# Altium PCB PCB1.PcbDoc
Units mm, origin at the board's own origin, x right, y up, seen from the top; angles counter-clockwise.
Board outline 90 x 60 mm, 2 copper layers (Top Layer, Bottom Layer); 38 components, 22 nets, 149 pads, 30 vias.
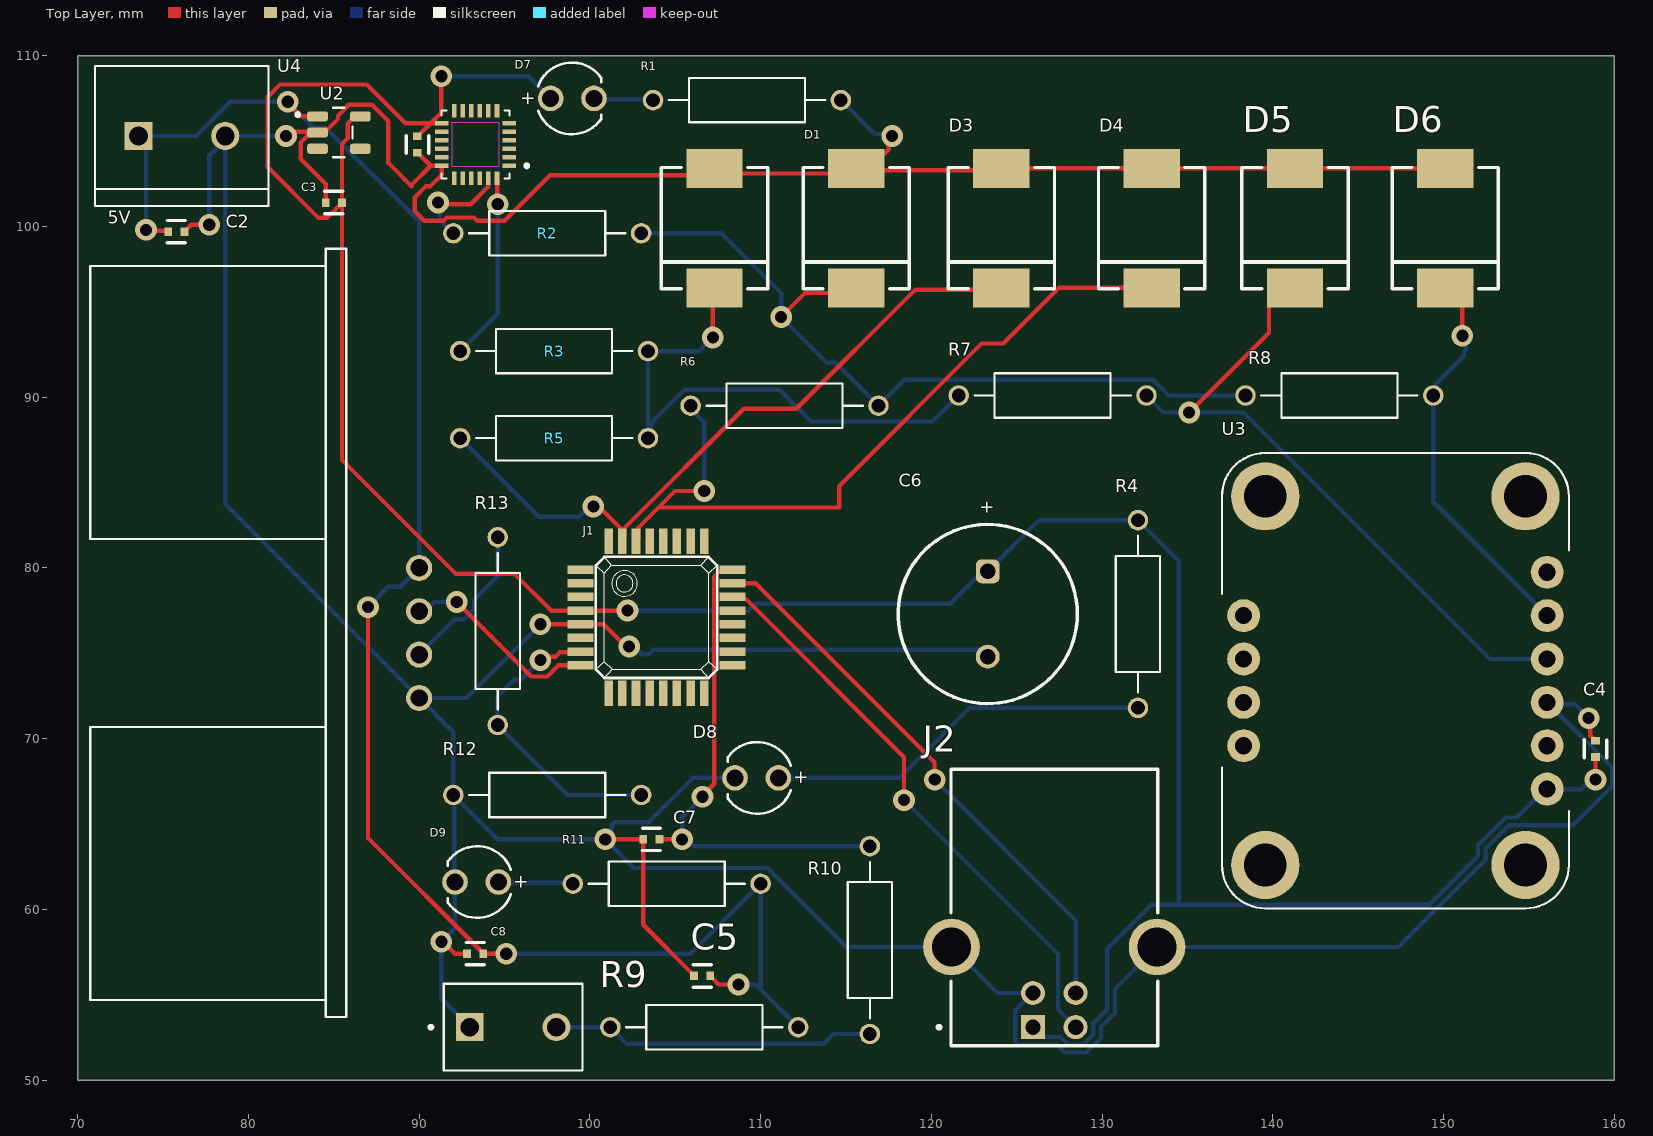
[diagram p0: Top Layer view]
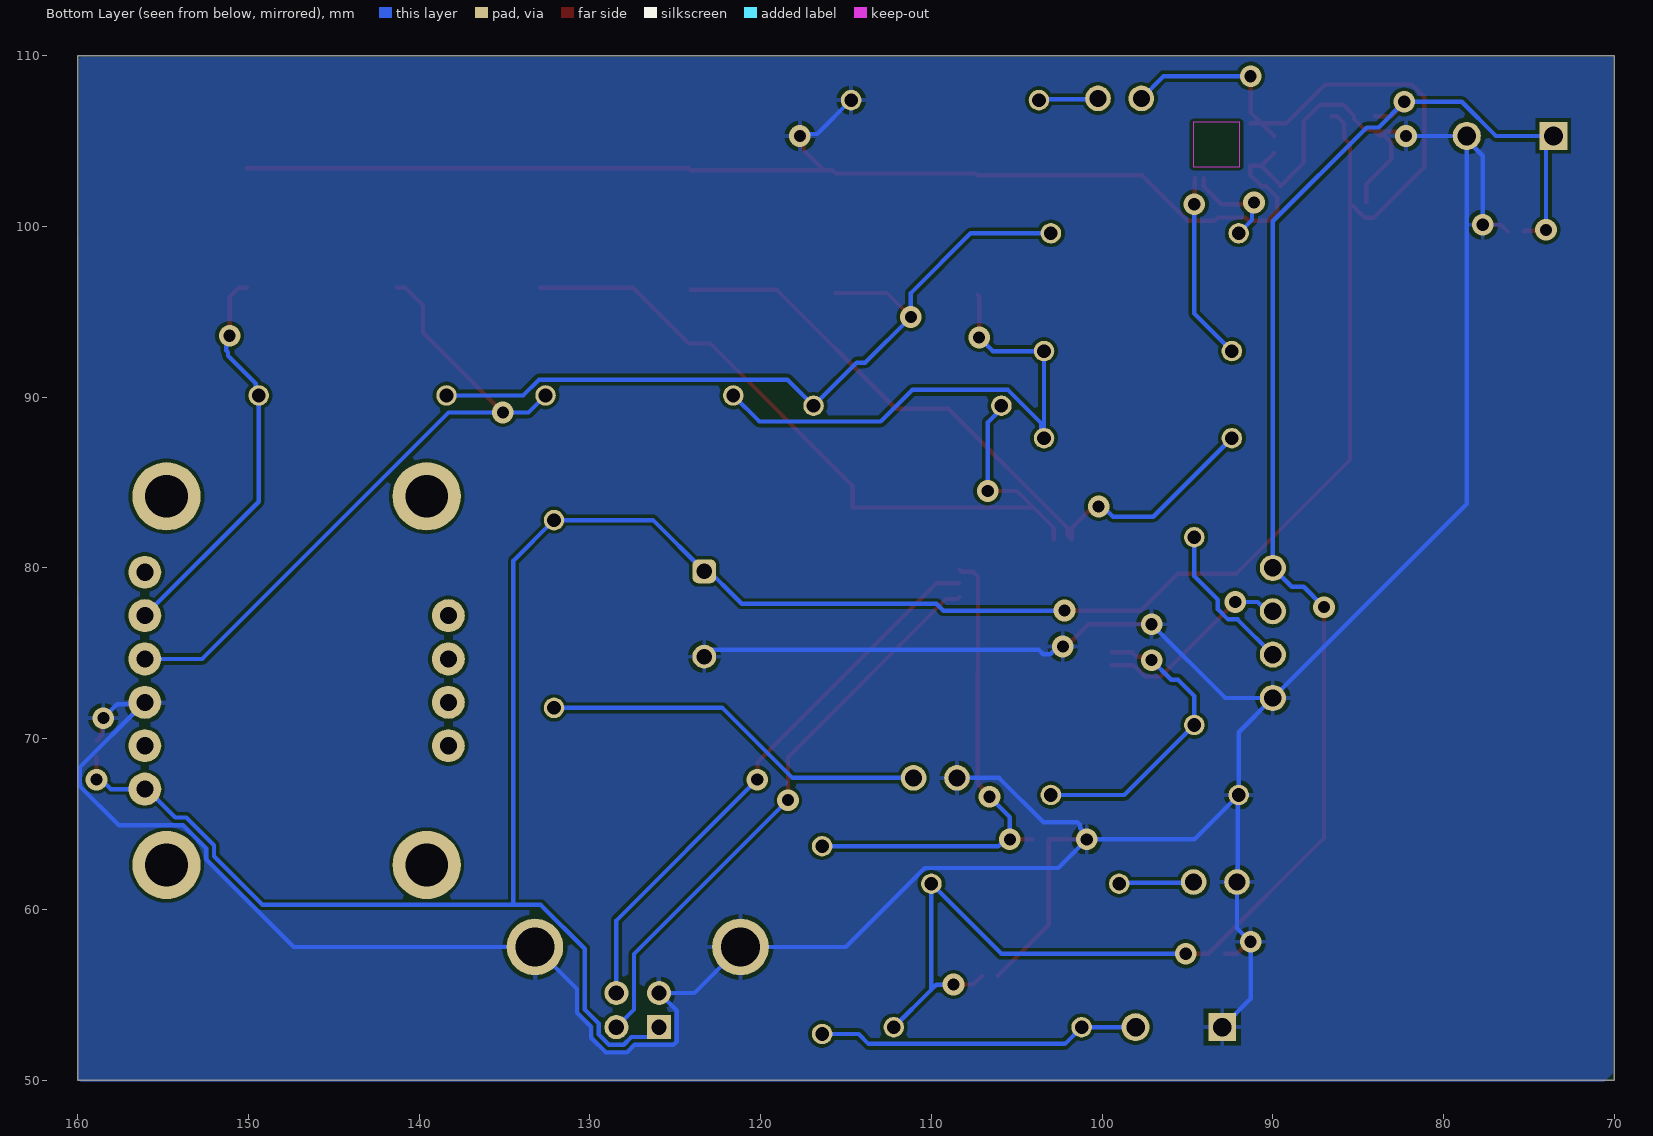
[diagram p1: Bottom Layer view, seen from below]
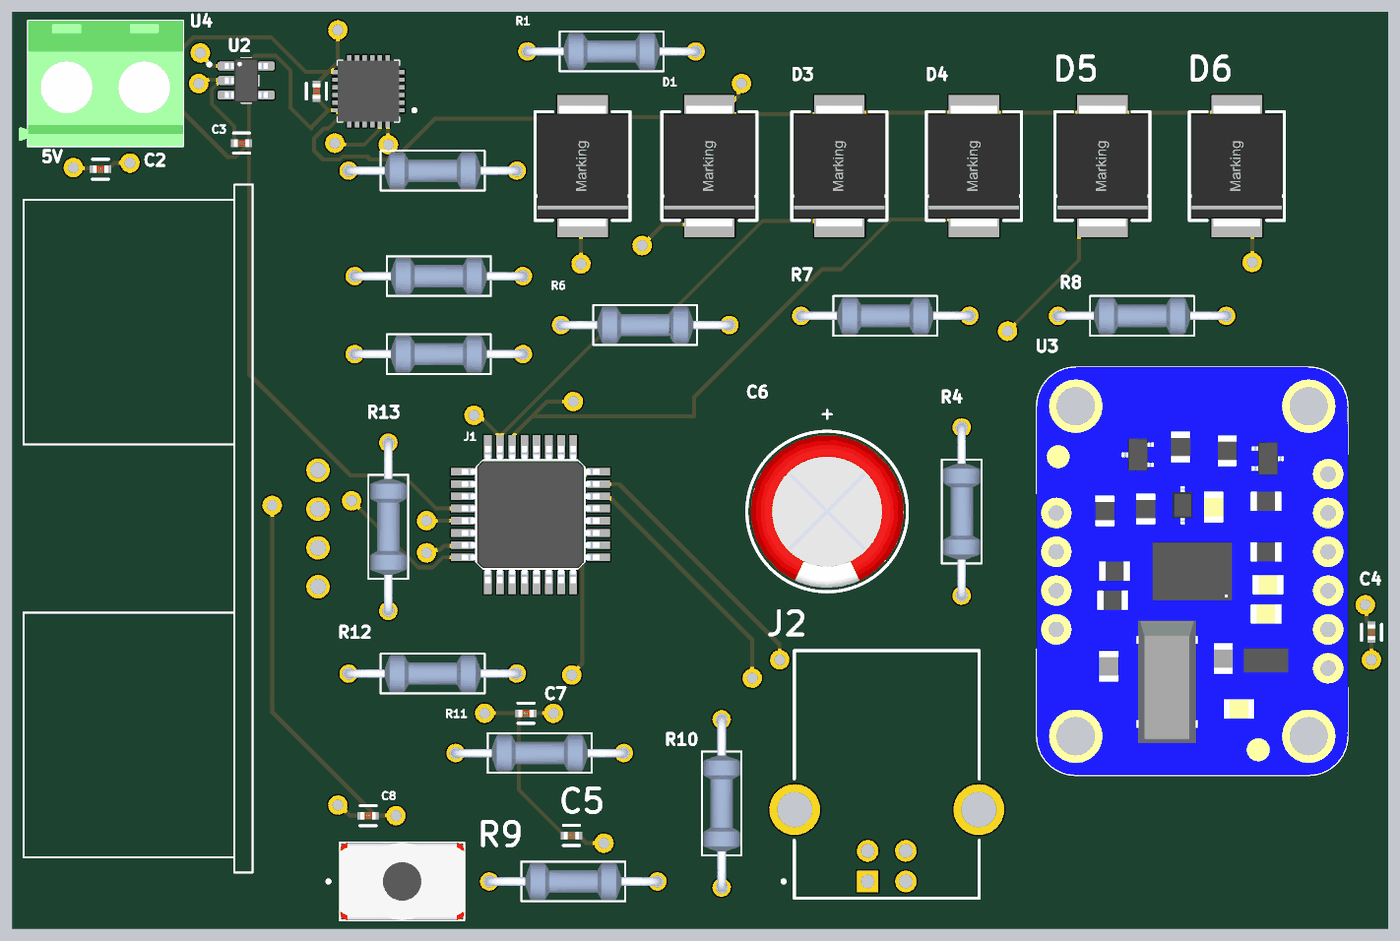
[diagram p2: 3D render of the assembled board from above, using the file's embedded part models]

## Layer stack, top to bottom
Top Solder: solder mask 0.0102, Solder Resist, Dk 3.5
Top Layer: signal copper 0.0356
Dielectric 1: dielectric 0.32, FR-4, Dk 4.8
Bottom Layer: signal copper 0.0356
Bottom Solder: solder mask 0.0102, Solder Resist, Dk 3.5

## Board outline
160,110 160,50 70,50 70,110

## Design rules (kind name [scope] priority, off if disabled: settings)
Clearance [All] p1: gap=0.2 ignorepadtopadclearanceinfootprint=TRUE
MinimumSolderMaskSliver MinimumSolderMaskSliver_3 [HasFootprint('SOT95P280X145-5N')] p1: minsoldermaskwidth=0
MinimumSolderMaskSliver MinimumSolderMaskSliver_2 [HasFootprint('QFP32_STM32') vs HasFootprint('QFP32_STM32')] p2: minsoldermaskwidth=0
MinimumSolderMaskSliver MinimumSolderMaskSliver_1 [HasFootprint('QFN50P400X400X95-24N') vs HasFootprint('QFN50P400X400X95-24N')] p3: minsoldermaskwidth=0
MinimumSolderMaskSliver [All] p4: minsoldermaskwidth=0.254
PolygonConnect [All] p1: connectstyle=Relief reliefconductorwidth=0.254 reliefentries=4 polygonreliefangle="90 Angle" airgapwidth=0.254
RoutingVias [All] p1: holewidth=0.711 width=1.27 viastyle="Through Hole" minholewidth=0.711 minwidth=1.27 maxholewidth=0.711 maxwidth=1.27
SilkToSolderMaskClearance SilkToSolderMaskClearance_5 [HasFootprint('SAMTEC_USB-B-S-X-X-TH')] p1: minsilkscreentomaskgap=0 clearancetoexposedcopper=TRUE
SilkToSolderMaskClearance SilkToSolderMaskClearance_4 [HasFootprint('QFP32_STM32')] p2: minsilkscreentomaskgap=0 clearancetoexposedcopper=TRUE
SilkToSolderMaskClearance SilkToSolderMaskClearance_3 [HasFootprint('QFN50P400X400X95-24N')] p3: minsilkscreentomaskgap=0 clearancetoexposedcopper=TRUE
SilkToSolderMaskClearance SilkToSolderMaskClearance_2 [HasFootprint('WE-TVSP_DO-214AB_Unidirectional')] p4: minsilkscreentomaskgap=0 clearancetoexposedcopper=TRUE
SilkToSolderMaskClearance SilkToSolderMaskClearance_1 [HasFootprint('WL-TMRC_D3.95H5.3')] p5: minsilkscreentomaskgap=0 clearancetoexposedcopper=TRUE
SilkToSolderMaskClearance [IsPad] p6: minsilkscreentomaskgap=0.254 clearancetoexposedcopper=TRUE
SolderMaskExpansion [All] p1: expansion=0.102 istentingtop=FALSE
SupplyNets "Schematic Supply Nets_2" [InNet('5')] p1: voltage=0.000
SupplyNets "Schematic Supply Nets_1" [InNet('+5')] p2: voltage=0.000
SupplyNets "Schematic Supply Nets" [InNet('GND')] p3: voltage=0.000
Width [All] p1: maxlimit=0.254 minlimit=0.254 preferedwidth=0.254
28 further rules are at their usual default settings.

## Classes and differential pairs
component class Sheet1: C1 C2 C3 C4 C5 C6 C7 C8 D1 D3 D4 D5 D6 D7 D8 D9 J1 J2 R1 R2 R3 R4 R5 R6 R7 R8 R9 R10 R11 R12 R13 U2 U3 U4

## Components (designator, comment, footprint, x,y, rotation, side; value= is the part's Value field where it differs from the comment)
C2 "1 Uf" FP-0402-L_1_0_0_05-W_0_5-MFG 75.775,99.7 r0 top
C3 "1 Uf" FP-0402-L_1_0_0_05-W_0_5-MFG 85,101.4 r180 top
C4 "1 Uf" FP-0402-L_1_0_0_05-W_0_5-MFG 158.9,69.4 r90 top
C5 "LMK105BJ105KVHF" FP-0402-L_1_0_0_05-W_0_5-MFG 106.575,56.1 r180 top
C6 "860040875005" WCAP-ATUL_D10H25 123.3,77.3 r90 top
C7 "LMK105BJ105KVHF" FP-0402-L_1_0_0_05-W_0_5-MFG 103.6,64.1 r180 top
C8 "1 Uf" FP-0402-L_1_0_0_05-W_0_5-MFG 93.275,57.4 r180 top
D1 "824550781" WE-TVSP_DO-214AB_Unidirectional 115.6,99.9 r90 top
D3 "824550781" WE-TVSP_DO-214AB_Unidirectional 124.1,99.9 r90 top
D4 "824550781" WE-TVSP_DO-214AB_Unidirectional 132.9,99.9 r90 top
D5 "824550781" WE-TVSP_DO-214AB_Unidirectional 141.3,99.9 r90 top
D6 "824550781" WE-TVSP_DO-214AB_Unidirectional 150.1,99.9 r90 top
D7 "151031VS06000" WL-TMRC_D3.95H5.3 1368.97,1377.5 r0 top
D8 "151031VS06000" WL-TMRC_D3.95H5.3 -1160.23,-1202.3 r180 top
D9 "151031VS06000" WL-TMRC_D3.95H5.3 -1176.63,-1208.4 r180 top
J1 "STM32G030K6T6" QFP32_STM32 103.9,77.1 r270 top
J2 "USB-B-S-X-X-TH" SAMTEC_USB-B-S-X-X-TH 127.2,57.8 r180 top
R1 "330" RESAD1100W55L680D260 109.2,107.4 r0 top
R2 "330" RESAD1100W55L680D260 97.5,99.6 r0 top
R3 "330" RESAD1100W55L680D260 97.9,92.7 r0 top
R4 "330" RESAD1100W55L680D260 132.1,77.3 r90 top
R5 "330 ohm" RESAD1100W55L680D260 97.9,87.6 r0 top
R6 "330" RESAD1100W55L680D260 111.4,89.5 r0 top
R7 "330" RESAD1100W55L680D260 127.1,90.1 r0 top
R8 "330" RESAD1100W55L680D260 143.9,90.1 r0 top
R9 "MFR-25FBF52-10K" RESAD1100W55L680D260 106.7,53.1 r0 top
R10 "1K" RESAD1100W55L680D260 116.4,58.2 r270 top
R11 "330" RESAD1100W55L680D260 104.5,61.5 r0 top
R12 "4.5k" RESAD1100W55L680D260 97.5,66.7 r0 top
R13 "1.5k" RESAD1100W55L680D260 94.6,76.3 r90 top
U2 "TLV73312PDBVR" SOT95P280X145-5N 85.3,105.5 r0 top
U3 "2472" MODULE_2472 147.18,73.395 r90 top
U4 "HC-SR04" XCVR_HC-SR04 90,76.19 r270 top
? "MPU-6050" QFN50P400X400X95-24N 93.3,104.8 r180 top
? "PMS9P1B10M2QE" SW_PMS9P1B10M2QE 95.5,53.1 r0 top
? "282837-2" TE_282837-2 76.1,105.3 r0 top
? "824550781" WE-TVSP_DO-214AB_Unidirectional 107.3,99.9 r90 top
? "1 Uf" FP-0402-L_1_0_0_05-W_0_5-MFG 89.9,104.8 r270 top

## Footprints (in the part's own frame and the unit in brackets; to place one, negate y for a bottom-side part, rotate by r counter-clockwise, add the part's x,y. Pads: shape width x height; smd on the part's side, far side on the other; paste and mask are expansions set on the pad)
FP-0402-L_1_0_0_05-W_0_5-MFG [mm]
  rect 0.45x0.5 smd paste+0 mask+0: 1(-0.475,0) 2(0.475,0)
  silkscreen extent -0.53,-0.66 0.53,0.65, body extent -0.8,-0.38 0.8,0.38, height 0.25
MODULE_2472 [mm]
  round 1.93 hole 1: 1(-6.35,-8.89) 2(-3.81,-8.89) 3(-1.27,-8.89) 4(1.27,-8.89) 5(3.81,-8.89) 6(6.35,-8.89) 7(3.81,8.89) 8(1.27,8.89) 9(-1.27,8.89) 10(-3.81,8.89)
  round 4 hole 2.5: SH1(-10.795,-7.62) SH2(10.795,-7.62) SH3(10.795,7.62) SH4(-10.795,7.62)
  silkscreen extent -13.33,-10.16 13.33,10.16, body extent -13.33,-10.16 13.33,10.16, height 4.23
QFN50P400X400X95-24N [mm]
  rect 0.79x0.28 smd: 1(-1.97,1.25) 2(-1.97,0.75) 3(-1.97,0.25) 4(-1.97,-0.25) 5(-1.97,-0.75) 6(-1.97,-1.25) 13(1.97,-1.25) 14(1.97,-0.75) 15(1.97,-0.25) 16(1.97,0.25) 17(1.97,0.75) 18(1.97,1.25)
  rect 0.28x0.79 smd: 7(-1.25,-1.97) 8(-0.75,-1.97) 9(-0.25,-1.97) 10(0.25,-1.97) 11(0.75,-1.97) 12(1.25,-1.97) 19(1.25,1.97) 20(0.75,1.97) 21(0.25,1.97) 22(-0.25,1.97) 23(-0.75,1.97) 24(-1.25,1.97)
  Keep-Out Layer region: 1.35,-1.3 -1.35,-1.3 -1.35,1.3 1.35,1.3
  silkscreen extent -3.1,-2 2,2, body extent -2,-2 2,2, height 0.93
QFP32_STM32 [mm]
  rect 0.5x1.5 smd: 1(-2.8,-4.45) 2(-2,-4.45) 3(-1.2,-4.45) 4(-0.4,-4.45) 5(0.4,-4.45) 6(1.2,-4.45) 7(2,-4.45) 8(2.8,-4.45) 17(2.8,4.45) 18(2,4.45) 19(1.2,4.45) 20(0.4,4.45) 21(-0.4,4.45) 22(-1.2,4.45) 23(-2,4.45) 24(-2.8,4.45)
  rect 1.5x0.5 smd: 9(4.45,-2.8) 10(4.45,-2) 11(4.45,-1.2) 12(4.45,-0.4) 13(4.45,0.4) 14(4.45,1.2) 15(4.45,2) 16(4.45,2.8) 25(-4.45,2.8) 26(-4.45,2) 27(-4.45,1.2) 28(-4.45,0.4) 29(-4.45,-0.4) 30(-4.45,-1.2) 31(-4.45,-2) 32(-4.45,-2.8)
  silkscreen extent -3.55,-3.55 3.55,3.55, body extent -4.5,-4.5 4.5,4.5, height 1.6
RESAD1100W55L680D260 [mm]
  round 1.2 hole 0.8: 1(-5.5,0) 2(5.5,0)
  silkscreen extent -4.58,-1.3 4.58,1.3, body extent -5.77,-1.2 5.77,1.2, height 2.4
SAMTEC_USB-B-S-X-X-TH [mm]
  rect 1.408x1.408 / inner round 1.408 / far side rect 1.408x1.408 hole 0.9: 1(1.25,4.7)
  round 1.408 hole 0.9: 2(-1.25,4.7) 3(-1.25,2.7) 4(1.25,2.7)
  round 3.316 hole 2.3: S1(-6.02,0) S2(6.02,0)
  silkscreen extent -6.05,-10.4 6.85,5.8
SOT95P280X145-5N [mm]
  rrect50% 1.21x0.59 smd: 1(-1.255,0.95) 2(-1.255,0) 3(-1.255,-0.95) 4(1.255,-0.95) 5(1.255,0.95)
  silkscreen extent -2.51,-1.45 0.8,1.45, body extent -1.4,-1.45 1.4,1.45, height 1.45
SW_PMS9P1B10M2QE [mm]
  rect 1.635x1.635 / inner round 1.635 / far side rect 1.635x1.635 hole 1.09: 1(-2.54,0)
  round 1.635 hole 1.09: 3(2.54,0)
  silkscreen extent -4.91,-2.54 4.07,2.54, body extent -4.07,-2.54 4.07,2.54, height 12.33
TE_282837-2 [mm]
  rect 1.65x1.65 / inner round 1.65 / far side rect 1.65x1.65 hole 1.1: 1(-2.54,0)
  round 1.65 hole 1.1: 2(2.54,0)
  silkscreen extent -5.08,-4.1 5.08,4.1, body extent -5.68,-4.1 5.08,4.1, height 10
WCAP-ATUL_D10H25 [mm] "Aluminum Electrolytic Capacitors, 10x25mm"
  rrect50% 1.4x1.4 hole 0.9: 1(2.5,0)
  round 1.4 hole 0.9: 2(-2.5,0)
  silkscreen extent -5.25,-5.25 5.25,5.25, body extent -4.99,-5 5,5, height 25.31
WE-TVSP_DO-214AB_Unidirectional [mm] "Power TVS Diode, 2-Leads. body 6.86x5.9mm"
  rect 2.3x3.3 smd: 1(-3.5,0) 2(3.5,0)
  silkscreen extent -3.55,-3.11 3.56,3.11, body extent -3.97,-2.95 3.97,2.95, height 2.48
WL-TMRC_D3.95H5.3 [mm] "THT Mono-color Round Color LED, 2-leads"
  round 1.5 hole 1: 1(-1271.27,-1270) 2(-1268.73,-1270)
  silkscreen extent -1272,-1272.1 -1268.31,-1267.9, body extent -1271.99,-1271.97 -1268.37,-1268.03, height 5.35
XCVR_HC-SR04 [mm]
  round 1.53 hole 1.02: 1(-3.81,0) 2(-1.27,0) 3(1.27,0) 4(3.81,0)
  silkscreen extent -22.5,-19.27 22.5,-4.27

## Part data
C2 C3 C4 C5 C7 C8 ?: library part CMP-14477-000640-2, "None", Capacitance=1uF, Case Code (Imperial)=0402, Case Code (Metric)=1005, Max Operating Temperature=85°C, Min Operating Temperature=-55°C, Ratings=AEC-Q200, Tolerance=10%, Voltage Rating=10V, Case/Package=0402, Halogen Free="Halogen Free", Lead Free="Lead Free", Length=0.039inch, Mount="Surface Mount", Packaging="Tape and Reel", RoHS Compliant=Yes, Series=M, Thickness=0.022inch, Voltage Rating (DC)=10V, Width=0.02inch
C6: library part CMP-03913-54202262-1, "860040875005 WCAP-ATUL Aluminum Electrolytic Capacitors", Capacitance=100µF, Case/Package=Radial, Leakage Current=100µA, Max Operating Temperature=105°C, Min Operating Temperature=-40°C, Ripple Current=800mA, Tolerance=20%, Voltage Rating=100V, Diameter=10mm, Height=25mm, Height - Seated (Max)=26.4922mm, Impedance=200mΩ, Lead Pitch=5.0038mm, Length=25mm, Life (Hours)=7000hours, Mount="Through Hole", NexarPartId=54202262, Packaging="Tape & Box (TB)", Pitch=5mm, Polarity=Polar, REACH SVHC=Unknown, RoHS=Compliant, Voltage Rating (DC)=100V
D1 D3 D4 D5 D6 ?: library part CMP-03913-71101749-1, "824550781 TVS diode [Würth Elektronik] 824550781 TVS diode", Clamping Voltage=126V, Leakage Current=2µA, Max Breakdown Voltage=91.25V, Max Operating Temperature=150°C, Min Operating Temperature=-65°C, Peak Pulse Current=23.8A, Peak Pulse Power=3kW, Power Line Protection=No, Reverse Standoff Voltage=78V, Composition=Zener, Height=2.5mm, Length=6.86mm, Min Breakdown Voltage=91.25V, Mount="Surface Mount", NexarPartId=71101749, Number of Pins=2, Number of Unidirectional Channels=1, Packaging="Cut Tape", Polarity=Unidirectional, REACH SVHC=Unknown, RoHS=Compliant, Width=5.91mm
D7 D8 D9: library part CMP-1488-00004-2, Case/Package=Radial, Color=Green, Forward Current=100mA, Forward Voltage=2.2V, Max Operating Temperature=85°C, Max Reverse Voltage (DC)=5V, Min Operating Temperature=-40°C, Test Current=20mA, Dominant Wavelength=568nm, Height=5.3mm, Lead Free="Lead Free", Length=3mm, Lens Size=3mm, Lens Style="Circular, Diffused, Round", Luminous Intensity=30mcd, Mount="Through Hole", NexarPartId=29717805, Packaging=Bulk, Peak Wavelength=560nm, REACH SVHC=Unknown, RoHS=Compliant, Viewing Angle=60°, Wavelength=568nm, Width=3mm
J1: "ARMÂ® CortexÂ®-M0+ STM32G0 Microcontroller IC 32-Bit Single-Core 64MHz 32KB (32K x 8) FLASH 32-LQFP (7x7)", Package="LQFP-32 STMicroelectronics", Check_prices=https://www.snapeda.com/parts/STM32G030K6T6/STMicroelectronics/view-part/?ref=eda, MF=STMicroelectronics, MP=STM32G030K6T6, SnapEDA_Link=https://www.snapeda.com/parts/STM32G030K6T6/STMicroelectronics/view-part/?ref=snap
J2: "USB-B (USB TYPE-B) USB 2.0 Receptacle Connector 4 Position Through Hole, Right Angle", Package=None, Check_prices=https://www.snapeda.com/parts/USB-B-S-F-W-TH-TR/Samtec/view-part/?ref=eda, MF=Samtec, MP=USB-B-S-F-W-TH-TR, SnapEDA_Link=https://www.snapeda.com/parts/USB-B-S-F-W-TH-TR/Samtec/view-part/?ref=snap
R1 R2 R3 R4 R5 R6 R7 R8 R10 R11: library part MFR-25FBF52-10K, "10.2 kOhms Â±1% 0.25W, 1/4W Through Hole Resistor Axial - Metal Film", Package="RADIAL-2 YAGEO", Check_prices=https://www.snapeda.com/parts/MFR-25FBF52-10K/Yageo/view-part/?ref=eda, MF=Yageo, MP=MFR-25FBF52-10K, SnapEDA_Link=https://www.snapeda.com/parts/MFR-25FBF52-10K/Yageo/view-part/?ref=snap
R9: "10.2 kOhms Â±1% 0.25W, 1/4W Through Hole Resistor Axial - Metal Film", Package="RADIAL-2 YAGEO", Check_prices=https://www.snapeda.com/parts/MFR-25FBF52-10K/Yageo/view-part/?ref=eda, MF=Yageo, MP=MFR-25FBF52-10K, SnapEDA_Link=https://www.snapeda.com/parts/MFR-25FBF52-10K/Yageo/view-part/?ref=snap
R12: library part MFR-25FBF52-10K, "4.5", Package="RADIAL-2 YAGEO", Check_prices=https://www.snapeda.com/parts/MFR-25FBF52-10K/Yageo/view-part/?ref=eda, MF=Yageo, MP=MFR-25FBF52-10K, SnapEDA_Link=https://www.snapeda.com/parts/MFR-25FBF52-10K/Yageo/view-part/?ref=snap
R13: library part MFR-25FBF52-10K, Package="RADIAL-2 YAGEO", Check_prices=https://www.snapeda.com/parts/MFR-25FBF52-10K/Yageo/view-part/?ref=eda, MF=Yageo, MP=MFR-25FBF52-10K, SnapEDA_Link=https://www.snapeda.com/parts/MFR-25FBF52-10K/Yageo/view-part/?ref=snap
U2: "300-mA, capacitor-free, low-IQ, low-dropout voltage regulator with enable", Package="SOT-23-5 Texas Instruments", Check_prices=https://www.snapeda.com/parts/TLV73312PDBVR/Texas+Instruments/view-part/?ref=eda, MF="Texas Instruments", MP=TLV73312PDBVR, SnapEDA_Link=https://www.snapeda.com/parts/TLV73312PDBVR/Texas+Instruments/view-part/?ref=snap
U3: "Adafruit 9-DOF Absolute Orientation IMU Fusion Breakout - BNO055", Package="Non-Standard Adafruit", Check_prices=https://www.snapeda.com/parts/2472/Adafruit+Industries/view-part/?ref=eda, MF=Adafruit, MP=2472, SnapEDA_Link=https://www.snapeda.com/parts/2472/Adafruit+Industries/view-part/?ref=snap
U4: "Ultrasonic Sensor Module", Package=None, Availability=Unavailable, MP=HC-SR04, Price=None
?: "MPU-6050 series Accelerometer, Gyroscope, 3 Axis Sensor Evaluation Board", Package="QFN-24 InvenSense", Check_prices=https://www.snapeda.com/parts/MPU-6050/TDK+InvenSense/view-part/?ref=eda, MF="TDK InvenSense", MP=MPU-6050, SnapEDA_Link=https://www.snapeda.com/parts/MPU-6050/TDK+InvenSense/view-part/?ref=snap
?: "Pushbutton Switch SPST-NO Standard Through Hole", Package=None, Check_prices=https://www.snapeda.com/parts/PMS9P1B10M2QE/TE+Connectivity+ALCOSWITCH+Switches/view-part/?ref=eda, MF="TE Connectivity ALCOSWITCH Switches", MP=PMS9P1B10M2QE, SnapEDA_Link=https://www.snapeda.com/parts/PMS9P1B10M2QE/TE+Connectivity+ALCOSWITCH+Switches/view-part/?ref=snap
?: "Ð Ð°Ð·ÑŠÐµÐ¼Ð½Ñ‹Ðµ ÐºÐ»ÐµÐ¼Ð¼Ð½Ñ‹Ðµ ÐºÐ¾Ð»Ð¾Ð´ÐºÐ¸ Ð Ð¾Ð·ÐµÑ‚ÐºÐ° 2 Ð¿Ð¾Ð»Ð¾Ð¶ÐµÐ½Ð¸Ñ 5,08 Ð¼Ð¼ ÐŸÑ€Ð¸Ð¿Ð¾Ð¹ Ð¿Ñ€ÑÐ¼Ð¾Ð¹ Ñ‡ÐµÑ€ÐµÐ· Ð¾Ñ‚Ð²ÐµÑ€ÑÑ‚Ð¸Ðµ 13,5 Ð / ÐºÐ¾Ð½Ñ‚Ð°ÐºÑ‚", Package=None, Availability="In Stock", Check_prices=https://www.snapeda.com/parts/282837-2/TE+Connectivity+AMP+Connectors/view-part/?ref=eda, MF="TE Connectivity", MP=282837-2, Price=None, Purchase-URL=https://pricing.snapeda.com/search/part/282837-2/?ref=eda, SnapEDA_Link=https://www.snapeda.com/parts/282837-2/TE+Connectivity+AMP+Connectors/view-part/?ref=snap

## Via types
v1: diameter 1.27, hole 0.711, Top Layer to Bottom Layer, 30 vias

## Nets (pads, with @x,y where several pads share a name; then routed paths per layer and width w, separated by ;. In a path a pad name is that pad's centre, name@x,y a point inside that pad or via, vN(x,y) a via of type N, cw(c..) or ccw(c..) an arc to the next point about the centre after c; other vN are vias at no path point)
3.3V: ?.1@89.9,105.275 ?.13 C3.1 C4.1 C6.1 D7.1 J1.4 J2.1 R4.2 U2.5 U3.1 | length 173.5
  Top Layer w0.254: U2.5 86.245,106.45 85.808,106.013 85.808,105.155 85.475,104.822 C3.1@85.475,101.375 ; ?.1@89.9,105.275 89.925,105.275 90.023,105.373 90.023,105.398 90.675,106.05 ; v1(91.3,108.8) 91.3,106.675 90.675,106.05 ; ?.13 90.675,106.05 ; v1(102.2,77.5) J1.4 97.737,77.5 95.587,79.65 92.15,79.65 85.475,86.325 C3.1@85.475,101.375 ; v1(158.9,67.6) C4.1 ; C3.1@85.475,101.375 85.131,101.031 85.131,100.992 84.908,100.769 84.869,100.769 84.6,100.5 84.1,100.5 81.138,103.462 81.138,107.598 81.856,108.316 86.934,108.316 89.2,106.05 90.675,106.05
  Bottom Layer w0.254: v1(91.3,108.8) 96.4,108.8 D7.1 ; v1(102.2,77.5) 109.3,77.5 109.7,77.9 121.1,77.9 C6.1@123.4,80.2 ; C6.1 126.3,82.8 R4.2 134.481,80.419 134.481,60.273 ; J2.1 126.527,52.523 127.569,52.523 128.023,52.069 128.877,52.069 129.481,52.673 129.481,53.315 130.302,54.136 130.302,57.689 132.886,60.273 134.481,60.273 ; v1(158.9,67.6) 158.625,67.6 158.07,67.045 U3.1 155.954,67.045 154.29,65.381 153.648,65.381 152.019,63.752 152.019,63.11 149.182,60.273 134.481,60.273
5: U2.3
+5: ?.1@73.56,105.3 C2.1 C5.1 C8.1 R9.2 R11.2 U2.1 U4.1 | length 107.2
  Top Layer w0.254: v1(74,99.8) 74.05,99.75 75.25,99.75 C2.1 ; v1(82.3,107.3) 82.3,107.209 83.059,106.45 U2.1 ; v1(87,77.7) 87,64.175 93.75,57.425 C8.1 v1(95.1,57.4) ; C5.1 107.05,56.075 107.148,55.977 107.173,55.977 107.55,55.6 v1(108.7,55.6)
  Bottom Layer w0.254: v1(74,99.8) 74,104.86 73.56,105.3 76.934,105.3 78.934,107.3 v1(82.3,107.3) 83.8,105.8 84.5,105.8 90,100.3 U4.1 88.894,78.894 88.194,78.894 v1(87,77.7) ; v1(95.1,57.4) 105.9,57.4 R11.2 110,55.3 ; v1(108.7,55.6) 108.716,55.584 109.716,55.584 110,55.3 ; R9.2 110,55.3
D+: J1.23 J2.3 | length 33.1
  Top Layer w0.254: J1.23 109.7,79.1 120.184,68.616 120.184,67.616 v1(120.2,67.6)
  Bottom Layer w0.254: v1(120.2,67.6) 128.45,59.35 J2.3
D-: J1.22 J2.2 | length 33.9
  Top Layer w0.254: J1.22 108.473,78.177 109.135,78.177 118.4,68.912 v1(118.4,66.4)
  Bottom Layer w0.254: v1(118.4,66.4) 127.419,57.381 127.419,54.131 J2.2
GND: ?.1@92.96,53.1 ?.2@78.64,105.3 ?.2@89.9,104.325 ?.2@107.3,103.4 ?.18 C2.2 C3.2 C4.2 C5.2 C6.2 C7.2 C8.2 D1.2 D3.2 D4.2 D5.2 D6.2 D8.2 D9.2 J1.5 J2.4 J2.S1 J2.S2 R1.2 R12.1 U2.2 U3.3 U4.4 | length 316.4
  Top Layer w0.254: C2.2 76.25,99.725 76.348,99.823 76.373,99.823 76.65,100.1 v1(77.7,100.1) ; v1(82.2,105.3) 82.475,105.3 82.725,105.55 U2.2@83.995,105.55 ; C3.2 84.525,102.487 83.059,103.953 83.059,104.916 83.487,105.345 83.79,105.345 U2.2@83.995,105.55 ; ?.2@89.9,104.325 89.925,104.325 90.023,104.227 90.023,104.202 90.675,103.55 ; v1(91.3,58.1) 91.4,58.1 92.1,57.4 C8.2 ; v1(97.1,76.7) J1.5 100.8,76.7 102.1,75.4 v1(102.3,75.4) ; v1(100.9,64.1) C7.2 103.125,59.1 106.1,56.125 C5.2 ; v1(117.7,105.3) 117.506,105.106 117.506,104.506 D1.2@116.3,103.3 ; D6.2 D5.2 D4.2 124.2,103.4 124.1,103.3 D1.2@116.3,103.3 ; v1(158.5,71.2) 158.591,71.109 158.591,70.184 158.777,69.998 158.777,69.973 158.875,69.875 C4.2 ; U2.2@83.995,105.55 84.1,105.655 84.603,105.655 85.241,106.293 85.241,106.488 85.879,107.126 87.231,107.126 88.196,106.161 88.196,103.715 89.556,102.356 89.556,102.431 90.675,103.55 ; 90.675,103.55 ?.18 91.33,103.029 90.665,102.364 90.403,102.364 89.738,101.698 89.738,100.902 90.302,100.338 91.427,100.338 91.616,100.527 93.213,100.527 93.402,100.338 94.998,100.338 97.66,103 107.3,103 107.4,103.1 115.6,103.1 115.8,103.3 D1.2@116.3,103.3
  Bottom Layer w0.254: v1(77.7,100.1) 77.7,104.146 ?.2@78.64,105.086 ; v1(82.2,105.3) 78.64,105.3 ?.2@78.64,105.086 ; ?.1@92.96,53.1 91.3,54.76 v1(91.3,58.1) 92.1,58.9 D9.2 92.05,61.65 92.05,66.65 R12.1 ; v1(97.1,76.7) 92.78,72.38 U4.4 ; v1(102.3,75.4) 102.575,75.4 103.032,74.943 103.443,74.943 103.7,75.2 C6.2@123.4,75.2 ; D8.2 106.031,67.7 103.431,65.1 101.449,65.1 101.274,64.925 101.274,64.749 100.9,64.375 v1(100.9,64.1) ; R1.2 116.684,105.416 117.584,105.416 v1(117.7,105.3) ; v1(158.5,71.2) 157.691,72.009 U3.3@156.186,72.009 ; ?.2@78.64,105.086 78.64,83.74 U4.4 ; U4.4 92,70.38 R12.1 ; R12.1 94.6,64.1 v1(100.9,64.1) ; v1(100.9,64.1) 102.573,62.427 110.384,62.427 115.011,57.8 J2.S2 123.88,55.1 J2.4 124.919,54.069 124.919,52.261 125.111,52.069 127.381,52.069 127.835,51.615 129.065,51.615 129.935,52.485 129.935,53.127 130.756,53.948 130.756,55.336 J2.S1 147.351,57.8 152.473,62.922 152.473,63.564 153.836,64.927 157.587,64.927 159.862,67.202 159.862,68.333 U3.3@156.186,72.009 ; U3.3@156.186,72.009 U3.3 U3.3@156.186,72.009
HRC_Echo: J1.7 R12.2 R13.1 | length 17.7
  Top Layer w0.254: v1(97.1,74.6) 97.294,74.794 97.987,74.794 98.243,75.05 99.4,75.05 J1.7
  Bottom Layer w0.254: v1(97.1,74.6) 95.953,73.453 95.553,73.453 94.6,72.5 R13.1 98.7,66.7 R12.2
HRC_Trig: J1.8 U4.2 | length 11.8
  Top Layer w0.254: v1(92.2,78) 96.562,73.638 97.498,73.638 98.16,74.3 J1.8
  Bottom Layer w0.254: U4.2 90.345,77.46 90.885,78 v1(92.2,78)
Net_3: ?.3@98.04,53.1 R9.1 R10.2 | length 19
  Bottom Layer w0.254: ?.3@98.04,53.1 R9.1 102.181,52.119 113.678,52.119 114.259,52.7 R10.2
Net_23: ?.23 R2.1 | length 6.1
  Top Layer w0.254: v1(91.1,101.4) 91.2,101.3 93.017,101.3 94.037,102.32 94.037,102.817 ?.23
  Bottom Layer w0.254: v1(91.1,101.4) 91.216,101.284 91.216,100.384 R2.1
Net_24: ?.24 R3.1 | length 11.1
  Top Layer w0.254: ?.24 94.563,102.817 94.563,101.337 v1(94.6,101.3)
  Bottom Layer w0.254: R3.1 94.6,94.9 v1(94.6,101.3)
NetC7_1: C7.1 J1.24 R10.1 | length 29.9
  Top Layer w0.254: C7.1 v1(105.4,64.1) ; v1(106.6,66.6) 106.6,66.683 107.277,67.36 107.277,73.911 107.273,73.915 107.273,79.485 107.565,79.777 108.227,79.777 J1.24
  Bottom Layer w0.254: v1(106.6,66.6) 105.4,65.4 v1(105.4,64.1) 105.675,64.1 106.075,63.7 R10.1
NetD3_1: D3.1 J1.31 R5.1 | length 41.3
  Top Layer w0.254: v1(100.2,83.6) 100.394,83.406 100.707,83.406 101.777,82.335 101.777,81.673 102.023,81.919 102.023,82.335 109.005,89.318 112.08,89.318 119.062,96.3 D3.1@124.1,96.3
  Bottom Layer w0.254: R5.1 97,83 99.363,83 99.963,83.6 v1(100.2,83.6)
NetD4_1: D4.1 J1.30 R6.1 | length 45.7
  Top Layer w0.254: J1.30@102.823,81.673 102.823,82.335 104.026,83.538 ; v1(106.7,84.5) 104.988,84.5 104.026,83.538 ; D4.1 127.462,96.4 124.204,93.142 122.942,93.142 114.6,84.8 114.6,83.538 104.026,83.538
  Bottom Layer w0.254: R6.1 105.9,89.324 106.7,88.524 v1(106.7,84.5)
NetD5_1: D5.1 R7.2 U3.4 | length 40
  Top Layer w0.254: v1(135.1,89.1) 139.777,93.777 139.777,95.377 140.8,96.4 D5.1
  Bottom Layer w0.254: R7.2 133.6,89.1 v1(135.1,89.1) 138.278,89.1 152.713,74.665 U3.4
NetD6_1: D6.1 R8.2 U3.5 | length 23.5
  Top Layer w0.254: D6.1 150.577,96.4 151.1,95.877 v1(151.1,93.6)
  Bottom Layer w0.254: v1(151.1,93.6) 151.1,93.325 151.294,93.131 151.294,92.946 151.297,92.943 151.297,92.733 151.2,92.635 151.2,92.425 149.577,90.802 149.577,90.277 R8.2 149.4,83.875 U3.5
NetD7_2: D7.2 R1.1 | length 3.5
  Bottom Layer w0.254: D7.2 100.29,107.45 103.65,107.45 R1.1
NetD8_1: D8.1 R4.1 | length 22.8
  Bottom Layer w0.254: D8.1 118.14,67.7 122.24,71.8 R4.1
NetD9_1: D9.1 R11.1 | length 4.4
  Bottom Layer w0.254: D9.1 94.69,61.55 98.95,61.55 R11.1
NetR13_2: R13.2 U4.3 | length 9.1
  Bottom Layer w0.254: U4.3 92.064,76.984 92.621,76.984 93.216,77.579 93.216,78.136 94.6,79.52 R13.2
SCL: D1.1 R2.2 R6.2 R8.1 | length 46.4
  Top Layer w0.254: v1(111.2,94.7) 112.6,96.1 D1.1@115.6,96.1
  Bottom Layer w0.254: R2.2 107.7,99.6 111.2,96.1 v1(111.2,94.7) 113.875,92.025 114.375,92.025 R6.2 118.427,91.027 132.984,91.027 133.911,90.1 R8.1
SDA: ?.1@107.3,96.4 R3.2 R5.2 R7.1 | length 33
  Top Layer w0.254: v1(107.2,93.5) 107.2,95.9 ?.1@107.3,96
  Bottom Layer w0.254: v1(107.2,93.5) 106.4,92.7 R3.2 R5.2 103.581,87.781 103.581,88.492 105.516,90.427 111.114,90.427 112.968,88.573 120.073,88.573 R7.1
pads on no net: ?.1@95.27,103.55 ?.2@95.27,104.05 ?.3@95.27,104.55 ?.4 ?.5 ?.6 ?.7 ?.8 ?.9 ?.10 ?.11 ?.12 ?.14 ?.15 ?.16 ?.17 ?.19 ?.20 ?.21 ?.22 J1.1 J1.2 J1.3 J1.6 J1.9 J1.10 J1.11 J1.12 J1.13 J1.14 J1.15 J1.16 J1.17 J1.18 J1.19 J1.20 J1.21 J1.25 J1.26 J1.27 J1.28 J1.29 J1.32 U2.4 U3.2 U3.6 U3.7 U3.8 U3.9 U3.10 U3.SH1 U3.SH2 U3.SH3 U3.SH4

## Polygon pours and split planes (outlines as drawn)
GND on Bottom Layer "GND_L02_P003" (solid, remove dead copper, pour order 3): 159.9,110 159.8,109.9 70.1,109.9 70.1,50.4 70.6,49.9 160,49.9

## Silkscreen, mask and mechanical layers (free items; w line width, h text height)
Top Overlay:
  text "5V" at 71.754,100.154 h0.75

## Text inside footprints (layer, text, board x,y; h text height)
C6: Top Overlay "+" at 123.6,83.1 h0.75 r90
D7: Top Overlay "+" at 95.92,107.15 h0.8
D8: Top Overlay "+" at 112.82,68.05 h0.8 r180
D9: Top Overlay "+" at 96.42,61.95 h0.8 r180